# Altium PCB Solar.PcbDoc
Units mil, origin at the board's own origin, x right, y up, seen from the top; angles counter-clockwise.
Board outline 485 x 670 mil, 4 copper layers (Top Layer, GND, Signal Layer, Bottom Layer), stack 61.811 mil thick; 31 components, 21 nets, 99 pads, 22 vias.
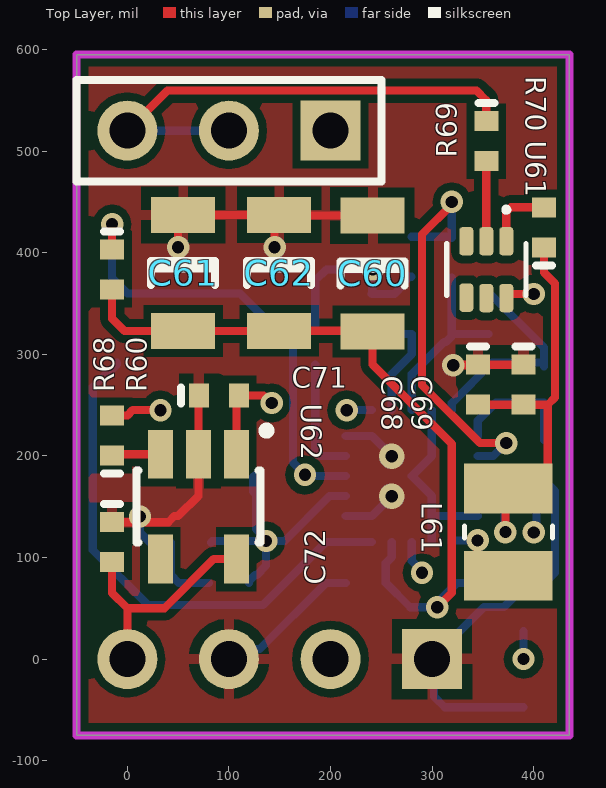
[diagram p0: Top Layer view]
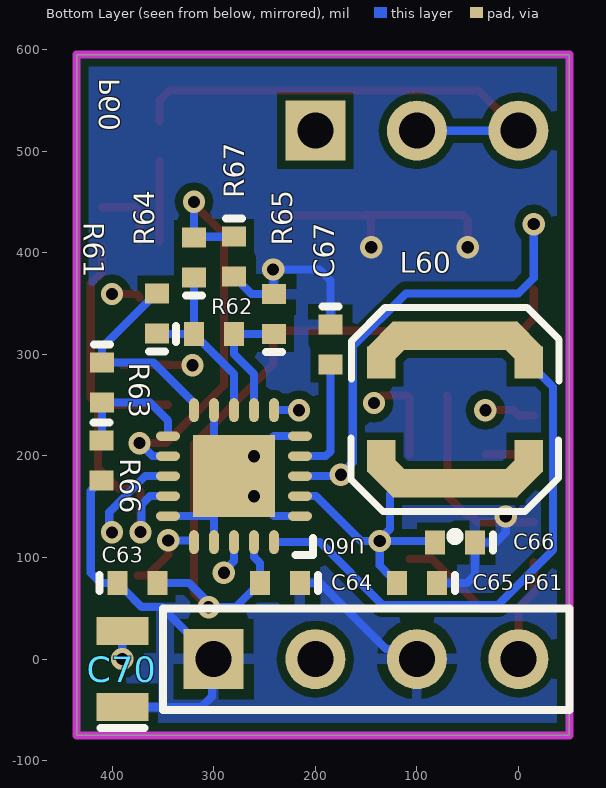
[diagram p1: Bottom Layer view, seen from below]
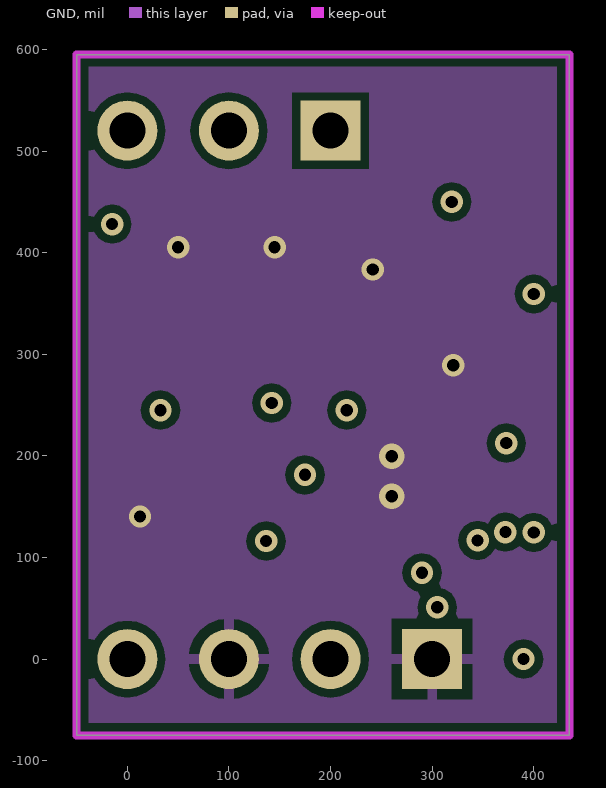
[diagram p2: GND]
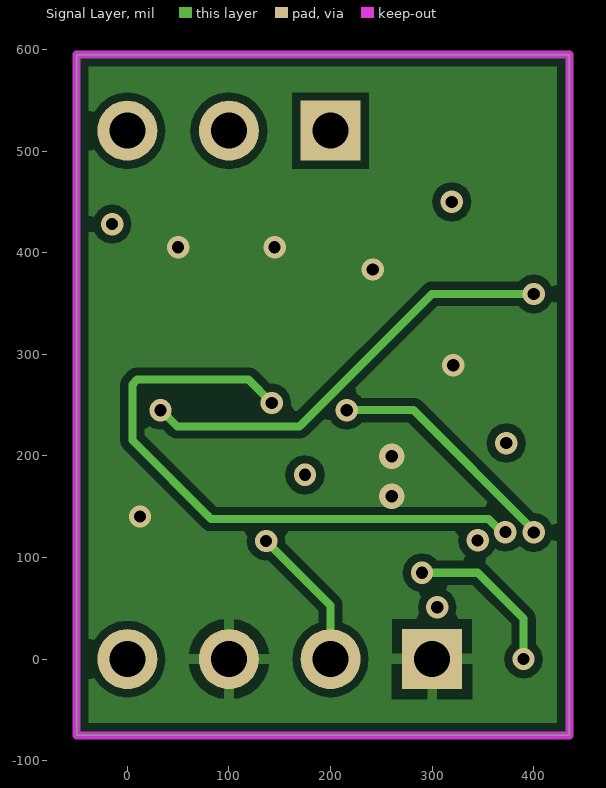
[diagram p3: Signal Layer]

## Layer stack, top to bottom
Top Solder: solder mask 0.7874, Solder Resist, Dk 3.5
Top Layer: signal copper 1.378
Dielectric 1: core 7.874, FR-4, Dk 4.2
GND: signal copper 0.689
Dielectric 3: prepreg 41.9291, Dk 4.2
Signal Layer: signal copper 0.689
Dielectric 2: core 7.874, Dk 4.2
Bottom Layer: signal copper 1.378
Bottom Solder: solder mask 0.7874, Solder Resist, Dk 3.5

## Board outline
-50,-75 435,-75 435,595 -50,595

## Design rules (kind name [scope] priority, off if disabled: settings)
Clearance Clearance_poly [InPolygon] p1: gap=8 ignorepadtopadclearanceinfootprint=FALSE
Clearance [All] p2: gap=6 ignorepadtopadclearanceinfootprint=FALSE except(5: SMDPad-SMDPad)
MinimumSolderMaskSliver [All] p1: minsoldermaskwidth=1
PolygonConnect [All] p1: thpad.connectstyle=Relief thpad.reliefconductorwidth=10 thpad.reliefentries=4 thpad.polygonreliefangle="90 Angle" thpad.airgapwidth=10 smdpad.connectstyle=Relief smdpad.reliefconductorwidth=10 smdpad.reliefentries=4 smdpad.polygonreliefangle="90 Angle" smdpad.airgapwidth=10 via.connectstyle=Direct via.reliefconductorwidth=10 via.reliefentries=4 via.polygonreliefangle="90 Angle" via.airgapwidth=10
RoomDefinition Solar [InComponentClass('Solar')] p1 off: confinementstyle=ConfineIn formatcopy=TRUE lockcomponents=FALSE outline 46.63,222.6 46.63,372.58 48.35,372.58 48.35,459.37 78.35,459.37 78.35,551.34 193.35,551.34 193.35,591.34 268.35,591.34 268.35,595.37 331.65,595.37 331.65,589.37 366.65,589.37 366.65,581.34 444.65,581.34 444.65,486.34 461.65,486.34 461.65,399.37 466.65,399.37 466.65,334.37 567.44,334.37 567.44,263.18 573,263.18 573,31.18 315.46,31.18 315.46,43.31 58.74,43.31 58.74,222.6
RoutingVias [All] p1: holewidth=9.84 width=19.68 viastyle="Through Hole" minholewidth=7.87 minwidth=17.72 maxholewidth=19.68 maxwidth=39.37
SilkToSilkClearance [All] p1: silktosilkclearance=1
SilkToSolderMaskClearance [IsPad] p1: minsilkscreentomaskgap=1 clearancetoexposedcopper=TRUE
SolderMaskExpansion [All] p1: expansion=4 istentingtop=FALSE
Width [All] p1: maxlimit=10 minlimit=6 preferedwidth=8 minimp=50.000000 maximp=50.000000 favimp=50.000000
27 further rules are at their usual default settings.

## Components (designator, comment, footprint, x,y, rotation, side; value= is the part's Value field where it differs from the comment)
C60 "220uF" 1206 241.42,379.48 r270 top
C61 "220uF" 1206 55,380 r270 top
C62 "220uF" 1206 149.44,380.19 r270 top
C63 "4.7uF" 0402 375,75 r180 bottom
C64 "0.1uF" 0402 234.72,75 r0 bottom
C65 "0.1uF" 0402 100,75 r0 bottom
C66 "4.7uF" 0402 62.5,114.72 r0 bottom
C67 "0.01uF" 0402 185,309.69 r270 bottom
C68 "22uF" 0402 345,270 r270 top
C69 "DNP" 0402 390,270 r270 top value=22uF
C70 "100uF" 0805 390,-10 r90 bottom
C71 "Cap" 0402 90,259.37 r0 top value=1uF
C72 "Cap" 0402 -15,115 r270 top value=1uF
L60 "Ind_LPS4018" LPS4018 67.03,237.3 r0 bottom value=22uH
L61 "10uH" IND1008 375,125 r90 top
P60 "Header 3" HDR1X3 200,520 r180 bottom
P61 "Header 4" HDR1X4 300,0 r180 bottom
R60 "0" 0402 -15,383.41 r270 top
R61 "2.94M" 0402 355.63,340 r90 bottom value=3.3M
R62 "6.8M" 0402 299.69,320 r180 bottom
R63 "5.49M" 0402 410,272.16 r270 bottom
R64 "6.8M" 0402 319.37,395 r90 bottom
R65 "5.49M" 0402 240.63,339.69 r90 bottom
R66 "4.22M" 0402 410.4,195.57 r270 bottom
R67 "6M" 0402 279.84,396.01 r270 bottom value=4.7M
R68 "0" 0402 -15,220 r90 top
R69 "0" 0402 353.3,509.69 r270 top
R70 "0" 0402 410,425 r90 top
U60 "BQ25570" BQ25570 280,180 r0 bottom
U61 "FDY1002PZ" SOT50P160X60-6N 353.3,383.27 r270 top
U62 "TPS7A0218PDBVR" SOT23-5 70,150 r180 top

## Footprints (in the part's own frame and the unit in brackets; to place one, negate y for a bottom-side part, rotate by r counter-clockwise, add the part's x,y. Pads: shape width x height; smd on the part's side, far side on the other; paste and mask are expansions set on the pad)
0402 [mm] "Surface Mount; Body 1 x 0.5 mm (LxW typ)"
  rect 0.5x0.6 smd: 1(-0.5,0) 2(0.5,0)
  silkscreen extent -0.95,-0.2 -0.95,0.2, body extent -0.5,-0.25 0.5,0.25, height 0.5
0805 [mm] "Surface Mount; Body 2.0 x 1.25 mm (LxW typ)"
  rect 0.7x1.3 smd: 1(-0.95,0) 2(0.95,0)
  silkscreen extent -1.48,-0.55 -1.48,0.55, body extent -1,-0.63 1,0.63, height 1.25
1206 [mm] "Surface Mount; Body 3.2 x 1.6 mm (LxW typ)"
  rect 0.9x1.6 smd: 1(-1.45,0) 2(1.45,0)
  silkscreen extent -0.3,-0.8 0.3,0.8, body extent -1.6,-0.8 1.6,0.8, height 1.1
BQ25570 [mm] "Boost Charger"
  oval 0.6x0.24 smd paste-0.025 mask+0.07: 1(-1.65,1) 2(-1.65,0.5) 3(-1.65,0) 4(-1.65,-0.5) 5(-1.65,-1) 11(1.65,-1) 12(1.65,-0.5) 13(1.65,0) 14(1.65,0.5) 15(1.65,1)
  oval 0.24x0.6 smd paste-0.025 mask+0.07: 6(-1,-1.65) 7(-0.5,-1.65) 8(0,-1.65) 9(0.5,-1.65) 10(1,-1.65) 16(1,1.65) 17(0.5,1.65) 18(0,1.65) 19(-0.5,1.65) 20(-1,1.65)
  rect 2.05x2.05 smd paste-1.025 mask+0.07: 21(0,0)
  silkscreen extent -1.97,1.54 -1.54,1.98, body extent -1.82,-1.82 1.83,1.83, height 1.01
HDR1X3 [mm] "Connector; Header; 3 Position"
  rect 1.5x1.5 hole 0.9: 1(0,0)
  round 1.5 hole 0.9: 2(2.54,0) 3(5.08,0)
HDR1X4 [mm] "Connector; Header; 4 Position"
  rect 1.5x1.5 hole 0.9: 1(0,0)
  round 1.5 hole 0.9: 2(2.54,0) 3(5.08,0) 4(7.62,0)
  silkscreen extent -1.27,-1.27 8.89,1.27
IND1008 [mm]
  rect 1.24x2.22 smd: 1(-1.09,0) 2(1.09,0)
  silkscreen extent -0.15,-1.1 0.15,1.1
LPS4018 [mil] "Inductor"
  rect 28x31.5 smd: 1(-77.03,37.61) 1(67.97,37.61) 2(-77.03,-54.39) 2(67.97,-54.39)
  rect 35.5x28 smd rot 45: 1(-68.53,55.61) 2(59.47,-72.39)
  rect 123x28 smd: 1(-4.53,64.11) 2(-4.53,-80.89)
  rect 35.5x28 smd rot 135: 1(59.47,55.61) 2(-68.03,-72.89)
  silkscreen extent -107,-109 98,120, body extent -85,-89 76,72, height 71
SOT23-5 [mm] "SOT23-5"
  rect 0.62x1.22 smd: 1(-0.95,-1.31) 2(0,-1.31) 3(0.95,-1.31) 4(0.95,1.31) 5(-0.95,1.31)
  silkscreen extent -1.8,-2 1.55,0.9, body extent -1.55,-0.9 1.55,0.9, height 1
SOT50P160X60-6N [mm]
  rrect50% 0.71x0.35 smd: 1(-0.71,0.5) 2(-0.71,0) 3(-0.71,-0.5) 4(0.7,-0.5) 5(0.71,0) 6(0.71,0.5)
  silkscreen extent -1.55,-0.99 0.65,0.99, body extent -0.8,-0.8 0.8,0.8, height 0.6

## Part data
C60 C61 C62: library part Cap, "Ceramic Capacitor (Surface Mount)", Digi-Key Part Number=490-13970-1-ND, Manufacturer="Murata Electronics", Manufacturer Part Number=GRM31CR60J227ME11L, Rating=6.3V, Note="CAP CER 220UF 6.3V X5R 1206"
C63 C66 C67: library part Cap, "Ceramic Capacitor (Surface Mount)", Digi-Key Part Number=490-14306-1-ND, Manufacturer="Murata Electronics", Manufacturer Part Number=GRM155R61A475MEAAD, Rating=10V, Note="CAP CER 4.7UF 10V X5R 0402"
C64 C65: library part Cap, "Ceramic Capacitor (Surface Mount)", Digi-Key Part Number=490-4759-1-ND, Manufacturer="Murata Electronics North America", Manufacturer Part Number=GCM155R71C104KA55D, Rating=16V, Note="CAP CER 0.1UF 16V X7R 0402"
C68 C69: library part Cap, "Ceramic Capacitor (Surface Mount)", Digi-Key Part Number=490-10476-1-ND, Manufacturer="Murata Electronics", Manufacturer Part Number=GRM188R61A226ME15D, Rating=10V, Note="CAP CER 22UF 10V X5R 0603"
C70: library part Cap, "Ceramic Capacitor (Surface Mount)", Digi-Key Part Number=490-13981-1-ND, Manufacturer="Murata Electronics", Manufacturer Part Number=GRM21BR60J107ME15L, Rating=6.3V, Note="CAP CER 100UF 6.3V X5R 0805"
C71 C72: "Ceramic Capacitor (Surface Mount)", Manufacturer="Generic Ceramic Chip Cap (TBD)"
L60: "Inductor (Surface Mount)", Manufacturer="Coil Craft", Manufacturer Part Number=LPS4018-223MRB, Rating=0.9A, Note="LPS4018 Low Profile 22uH 0.9A 20% SMD"
L61: library part Ind, "Inductor (Surface Mount)", Digi-Key Part Number=490-10563-1-ND, Manufacturer="Murata Electronics", Manufacturer Part Number=1239AS-H-100M=P2, Rating=1A, Note="FIXED IND 10UH 1A 460 MOHM SMD"
P60: "Header, 3-Pin", LatestRevisionDate=17-Jul-2002, LatestRevisionNote="Re-released for DXP Platform.", Publisher="Altium Limited"
P61: "Header, 4-Pin", LatestRevisionDate=17-Jul-2002, LatestRevisionNote="Re-released for DXP Platform.", Publisher="Altium Limited"
R60 R68 R69 R70: library part Res, "Chip Resistor (Surface Mount)", Digi-Key Part Number=311-0.0JRCT-ND, Manufacturer=Yageo, Manufacturer Part Number=RC0402JR-070RL, Rating=1/16W
R61: library part Res, "Chip Resistor (Surface Mount)", Digi-Key Part Number=311-3.30MLRCT-ND, Manufacturer=Yageo, Manufacturer Part Number=RC0402FR-073M3L, Rating=1/16W
R62 R64: library part Res, "Chip Resistor (Surface Mount)", Digi-Key Part Number=541-6.8MJCT-ND, Manufacturer="Vishay Dale", Manufacturer Part Number=CRCW04026M80JNED, Rating=1/16W
R63 R65 R67: library part Res, "Chip Resistor (Surface Mount)", Digi-Key Part Number=541-5.49MLCT-ND, Manufacturer="Vishay Dale", Manufacturer Part Number=CRCW04025M49FKED, Rating=1/16W
R66: library part Res, "Chip Resistor (Surface Mount)", Digi-Key Part Number=541-4.22MLCT-ND, Manufacturer="Vishay Dale", Manufacturer Part Number=CRCW04024M22FKED, Rating=1/16W
U60: "nano power boost charger and buck converter / for energy harvester powered applications", Case/Package=VQFN, Digi-Key Part Number=296-37014-1-ND, Manufacturer="Texas Instruments", Manufacturer Part Number=BQ25570RGRT, Max Operating Temperature=125°C, Max Supply Voltage=5.1V, Min Operating Temperature=-40°C, Min Supply Voltage=100mV, Operating Supply Current=488nA, Output Current=100mA, Package Quantity=250, Switching Frequency=1MHz, ComponentLink1Description=http://www.mouser.com/ds/2/405/bq25570-556801.pdf?src-supplier=Mouser, ComponentLink1URL=http://www.mouser.com/ds/2/405/bq25570-556801.pdf?src-supplier=Mouser, ComponentLink2Description=http://www.ti.com/lit/pdf/sluuaa7?src-supplier=Digi-Key, ComponentLink2URL=http://www.ti.com/lit/pdf/sluuaa7?src-supplier=Digi-Key, ComponentLink3Description=http://www.farnell.com/datasheets/1904809.pdf?src-supplier=Element14, ComponentLink3URL=http://www.farnell.com/datasheets/1904809.pdf?src-supplier=Element14, ComponentLink4Description=http://www.ti.com/lit/ds/symlink/bq25570.pdf?src-supplier=Digi-Key, ComponentLink4URL=http://www.ti.com/lit/ds/symlink/bq25570.pdf?src-supplier=Digi-Key, ComponentLink5Description=http://www.ti.com/lit/ds/symlink/bq25570.pdf?src-supplier=Avnet, ComponentLink5URL=http://www.ti.com/lit/ds/symlink/bq25570.pdf?src-supplier=Avnet, ComponentLink6Description=http://www.ti.com/general/docs/lit/getliterature.tsp?genericPartNumber=BQ25570&&fileType=pdf&src-supplier=Avnet, ComponentLink6URL=http://www.ti.com/general/docs/lit/getliterature.tsp?genericPartNumber=BQ25570&&fileType=pdf&src-supplier=Avnet, Contact Plating=Gold, Lead Free="Lead Free", Mount="Surface Mount", Number of Pins=20, Packaging="Tape and Reel", Pricing 1="1=7.94, 10=7.171, 25=6.8372, 100=5.6697 (USD)", Radiation Hardening=No, REACH SVHC="No SVHC", Stock 1=2223, Supplier 1=Digi-Key, Supplier Part Number 1=296-37014-1-ND
U61: "Mosfet Array 2 P-Channel (Dual) 20V 830mA 446mW Surface Mount SOT-563F", Package="SOT-563-6 ON Semiconductor", Availability="In Stock", Check_prices=https://www.snapeda.com/parts/FDY1002PZ/Onsemi/view-part/?ref=eda, MF="ON Semiconductor", MP=FDY1002PZ, Price=None, Purchase-URL=https://pricing.snapeda.com/search/part/FDY1002PZ/?ref=eda, SnapEDA_Link=https://www.snapeda.com/parts/FDY1002PZ/Onsemi/view-part/?ref=snap
U62: "IC REG LINEAR 1.8V 200MA SOT23-5"

## Via types
v1: diameter 22, hole 12, Top Layer to Bottom Layer, tented both sides, 20 vias
v2: diameter 25, hole 12, Top Layer to Bottom Layer, 2 vias

## Nets (pads, with @x,y where several pads share a name; then routed paths per layer and width w, separated by ;. In a path a pad name is that pad's centre, name@x,y a point inside that pad or via, vN(x,y) a via of type N, cw(c..) or ccw(c..) an arc to the next point about the centre after c; other vN are vias at no path point)
BAT_OK_RF: P60.2 P60.3 R69.1 | length 494.3
  Top Layer w8: P60.3 39.53,559.53 343.78,559.53 353.3,550 R69.1
  Bottom Layer w8: P60.3 P60.2
GND: C60.1 C61.1 C62.1 C63.1 C64.1 C65.1 C66.1 C67.1 C68.1 C69.1 C70.1 C71.1 C72.1 P61.1 P61.3 R65.2 R66.2 R67.2 U60.1 U60.5 U60.9 U60.15 U60.17 U60.21 U62.2 | length 1647.5
  Top Layer w8: C72.1 40.27,134.69 46.21,140.63 50,140.63 70,160.63 U62.2 70,259.05 C71.1 ; v1(50,405.31) 50,432.09 C61.1 C62.1@149.25,437.09 ; v1(145,405.31) 145,432.84 C62.1@149.25,437.09 ; C60.1 150.15,436.57 C62.1 C62.1@149.25,437.09 ; v1(320.81,289.14) 321.08,289.41 344.73,289.41 C68.1 C69.1
  Bottom Layer w8: v1(12.5,140.31) 12.5,124.38 22.16,114.72 C66.1 42.81,82.81 50.63,75 C65.1 ; P61.3 109.77,9.77 130.29,9.77 195.52,75 C64.1 ; C67.1 185,372.46 195.94,383.41 v1(241.47,383.41) 241.05,382.98 241.05,359.79 R65.2 262.88,359.37 272.03,368.52 272.03,370.49 277.87,376.33 R67.2 ; U60.1 240.63,140.63 v2(260.31,160.31) ; U60.5 240.63,219.37 v2(260.31,199.69) ; U60.17 299.69,137.68 ; U60.9 299.69,199.69 U60.21 299.69,160.31 299.69,137.68 ; U60.15 302.64,140.63 299.69,137.68 ; C70.1 312.4,-47.4 301.84,-36.84 301.84,-1.84 P61.1 351.18,51.18 370.87,51.18 386.87,67.19 388.84,67.19 394.69,73.03 C63.1 411.06,75 421.06,85 421.06,165.23 R66.2 ; R66.2@410,173.19 R66.2@411.97,173.19
LDO_EN_Solar: R68.1 U62.3 | length 48.1
  Top Layer w8: R68.1 -13.74,201.57 U62.3
NetC67_2: C67.2 U60.4 | length 117.6
  Bottom Layer w8: C67.2 185,204.37 189.69,199.69 U60.4
NetL60_2: L60.2 U60.20 | length 517.9
  Bottom Layer w8: L60.2@-10,291.69 -10,289.94 -20,279.94 -21.75,279.94 -34,267.69 -34,107.5 20.31,53.19 133.67,53.19 195.52,115.04 U60.20
NetL61_1: L61.1 U60.16 | length 79.8
  Top Layer w8: v1(344.73,116.81) 344.73,102.5 365.14,82.09 L61.1
  Bottom Layer w8: U60.16 319.37,116.15 320.04,116.81 v1(344.73,116.81)
NetR60_1: R60.1 U60.3 | length 453.5
  Top Layer w8: R60.1 v1(-15,428.09)
  Bottom Layer w8: v1(-15,428.09) -15,375 0.21,359.79 110.79,359.79 163.19,307.39 163.19,193.5 174.8,181.88 v1(174.8,181.33) ; v1@176.69,180 U60.3
NetR61_1: R61.1 R62.1 R64.1 U60.8 | length 184.1
  Bottom Layer w8: U60.8 280,280.63 311.56,312.19 313.53,312.19 319.37,318.03 R62.1 ; R64.1 R62.1 ; R61.1@355.63,320 R62.1
NetR61_2: R61.2 R63.1 U60.10 | length 208.7
  Bottom Layer w8: U60.10 319.37,252.05 359.17,291.84 R63.1 ; R61.2@356.21,360.26 410,306.47 R63.1 ; R63.1@410,288.09 R63.1
NetR62_2: R62.2 R65.1 U60.7 | length 122.6
  Bottom Layer w8: R65.1 R62.2 280,300.43 260.31,280.74 U60.7
NetR63_2: R63.2 R66.1 U60.11 | length 124.5
  Bottom Layer w8: U60.11 344.96,234.61 362.83,252.47 R63.2 410,244.96 R66.1@410,215.66
NetR64_2: R64.2 R67.1 U60.12 | length 407.9
  Top Layer w8: v1(319.37,450) 319.37,447.46 290,418.09 290,269.52 346.96,212.56 v1(372.99,212.56)
  Bottom Layer w8: R67.1 318.36,415.7 R64.2 v1(319.37,450) ; U60.12 360.12,199.69 v1(372.99,212.56)
NetR68_2: R68.2 U61.6 | length 507.3
  Top Layer w8: R68.2 0,239.69 5.28,244.96 v1(32.6,244.96) ; U61.6 372.99,356.48 375.88,359.37 v1(400.06,359.37)
  Signal Layer w8: v1(32.6,244.96) 33.2,244.96 49.16,229 169.38,229 299.75,359.37 v1(400.06,359.37)
NetR69_2: R69.2 U61.2 | length 78.8
  Top Layer w8: U61.2 R69.2
NetR70_2: R70.2 U61.1 | length 67.7
  Top Layer w8: U61.1 372.99,440 377.68,444.69 R70.2
NetU60_6: U60.6 U60.13 | length 353.3
  Signal Layer w8: v1(216,244.96) 281.72,244.96 400.06,126.62 v1(400.06,124.7)
  Bottom Layer w8: v1(216,244.96) U60.6 ; U60.13 367.39,180 402.96,144.43 402.74,144.22 402.74,127.38 v1(400.06,124.7)
"Solar cell": C65.2 C66.2 L60.1 P61.2 U60.2 | length 415.4
  Signal Layer w8: v1(136.61,116.15) 200,52.75 P61.2
  Bottom Layer w8: C66.2 83.61,116.15 v1(136.61,116.15) ; C65.2 119.69,76.97 125.53,82.81 127.5,82.81 136.61,91.92 v1(136.61,116.15) ; L60.1@126.5,181.69 123.85,179.03 123.85,164.89 126.5,162.24 126.5,127.83 136.61,117.73 v1(136.61,116.15) ; U60.2 199.12,160.31 154.95,116.15 v1(136.61,116.15)
VBAT_solar: C70.2 U60.18 | length 220.1
  Signal Layer w8: v1(290,85) 344.73,85 390,39.73 v1(390,0)
  Bottom Layer w8: U60.18 280,96.69 290,86.69 v1(290,85) ; v1(390,0) C70.2
VCC_Solar: C68.2 C69.2 C71.2 L61.2 R70.1 U60.14 U62.1 | length 1144.3
  Top Layer w8: U62.1 107.4,257.09 C71.2 133.89,259.37 141.21,252.05 v1(142.19,252.05) ; C68.2 C69.2 413.81,250.31 ; v1(372.06,124.92) 372.06,164.98 L61.2 393.4,167.91 413.81,188.32 413.81,250.31 ; R70.1 410,380.6 421.06,369.54 421.06,257.57 413.81,250.31
  Signal Layer w8: v1(142.19,252.05) 119.24,275 9.69,275 5,270.31 5,215.33 82.51,137.81 355.46,137.81 368.36,124.92 v1(372.06,124.92)
  Bottom Layer w8: U60.14 362.67,160.31 371.07,151.92 371.07,125.91 v1(372.06,124.92)
VREG: C72.2 P61.4 U62.5 | length 229
  Top Layer w8: C72.2 -15,65 0,50 ; P61.4 0,50 ; U62.5 85,98.43 36.57,50 0,50
VStore_Solar: C60.2 C61.2 C62.2 C63.2 C64.2 R60.2 U60.19 | length 765
  Top Layer w8: R60.2 -15,335 -2.91,322.91 C61.2 149.25,322.91 C62.2 240.71,323.11 C60.2 241.42,289.74 319.37,211.79 319.37,65.32 v1(305,50.95)
  Bottom Layer w8: U60.19 260.31,100.31 254.41,94.41 C64.2 278.46,50.95 v1(305,50.95) ; v1@302.64,53.19 324.45,75 C63.2
pads on no net: P60.1 U61.3 U61.4 U61.5 U62.4

## Polygon pours and split planes (outlines as drawn)
GND on Top Layer "GND_L01_P002" (solid, pour order 2): 440,590 440,-80 -50,-80 -50,590
GND on GND "GND-GND" (solid, pour order 4): 445,590 -50,590 -50,-70 445,-70
GND on Signal Layer "GND-GND" (solid, pour order 9): 430,585 -45,585 -45,-75 430,-75
GND on Bottom Layer "GND-GND" (solid, pour order 10): 430,590 -45,590 -45,-70 430,-70

## Keep-outs
Keep-Out Layer:
  the board outline again, w7.87

## Silkscreen, mask and mechanical layers (free items; w line width, h text height)
Mechanical 1:
  lines w10: 420,-75 430,-75 430,595 420,595 ; 420,-75 -50,-75 -50,595 420,595 ; 420,-75 420,595